# Altium PCB YYB-PCB1.PcbDoc
Units mil, origin at the board's own origin, x right, y up, seen from the top; angles counter-clockwise.
Board outline 510.03 x 10390.03 mil, 2 copper layers (Top Layer, Bottom Layer); 69 components, 56 nets, 369 pads, 0 vias.
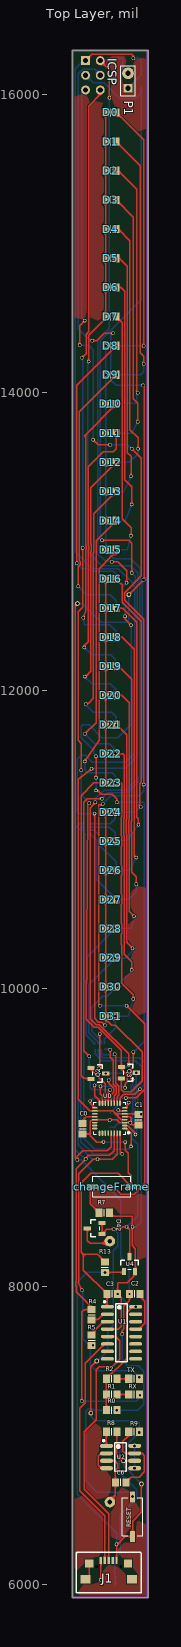
[diagram p0: Top Layer view]
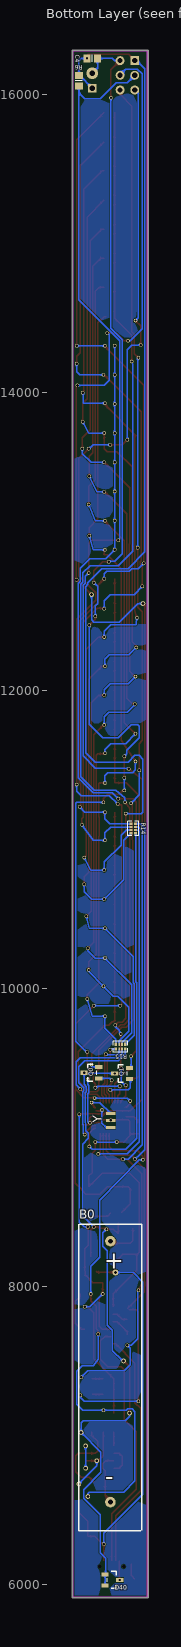
[diagram p1: Bottom Layer view, seen from below]
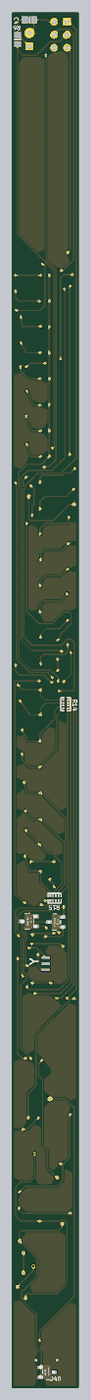
[diagram p2: 3D render of the assembled board from below, using the file's embedded part models]

## Layer stack, top to bottom
Top Solder: solder mask 0.4, Solder Resist, Dk 3.5
Top Layer: signal copper 1.4
Dielectric 1: dielectric 12.6, FR-4, Dk 4.8
Bottom Layer: signal copper 1.4
Bottom Solder: solder mask 0.4, Solder Resist, Dk 3.5

## Board outline
16889.99,5915 ccw(c16895,5915) 16895,5909.98 17395,5909.98 ccw(c17395,5915) 17400.01,5915 17400.01,16290 ccw(c17395,16290) 17399.35,16292.5 ccw(c17395,16295) 17400.01,16295 ccw(c17395,16295) 17395,16300.01 16895,16300.01 ccw(c16895,16295) 16889.99,16295

## Design rules (kind name [scope] priority, off if disabled: settings)
Clearance [All] p1: gap=7
PolygonConnect [All] p1: connectstyle=Relief reliefconductorwidth=10 reliefentries=4 polygonreliefangle="90 Angle" airgapwidth=10
RoutingVias [All] p1: holewidth=28 width=50 viastyle="Through Hole" minholewidth=28 minwidth=50 maxholewidth=28 maxwidth=50
SolderMaskExpansion [All] p1: expansion=4
Width [All] p1: maxlimit=10 minlimit=10 preferedwidth=10
30 further rules are at their usual default settings.

## Components (designator, comment, footprint, x,y, rotation, side; value= is the part's Value field where it differs from the comment)
B0 "Battery" LI 19525,3025 r180 bottom
C0 "" 6-0805_N 16960,9060 r90 top
C1 "Cap" 6-0805_N 17335,9120 r90 top
C2 "Cap" 6-0805_N 17310,7950 r180 top
C3 "Cap" 6-0805_N 17160,7950 r0 top
C4 "Cap" 6-0805_N 17265,16245 r0 bottom
C6 "Cap" 6-0805_N 17215,6685 r0 top
changeFrame "SW-PB" KEY_SODFL_2-LEADS 17155,8670 r180 top
D0 "LED" LED_0805 17150,15881.77 r0 top
D1 "LED" LED_0805 17150,15686.07 r0 top
D2 "LED" LED_0805 17150,15490.36 r0 top
D3 "LED" LED_0805 17150,15294.66 r0 top
D4 "LED" LED_0805 17150,15098.96 r0 top
D5 "LED" LED_0805 17150,14903.26 r0 top
D6 "LED" LED_0805 17150,14707.56 r0 top
D7 "LED" LED_0805 17150,14511.85 r0 top
D8 "LED" LED_0805 17150,14316.15 r0 top
D9 "LED" LED_0805 17150,14120.45 r0 top
D10 "LED" LED_0805 17150,13924.75 r0 top
D11 "LED" LED_0805 17150,13729.04 r0 top
D12 "LED" LED_0805 17150,13533.34 r0 top
D13 "LED" LED_0805 17150,13337.64 r0 top
D14 "LED" LED_0805 17150,13141.94 r0 top
D15 "LED" LED_0805 17150,12946.24 r0 top
D16 "LED" LED_0805 17150,12750.53 r0 top
D17 "LED" LED_0805 17150,12554.83 r0 top
D18 "LED" LED_0805 17150,12359.13 r0 top
D19 "LED" LED_0805 17150,12163.43 r0 top
D20 "LED" LED_0805 17150,11967.72 r0 top
D21 "LED" LED_0805 17150,11772.02 r0 top
D22 "LED" LED_0805 17150,11576.32 r0 top
D23 "LED" LED_0805 17150,11380.62 r0 top
D24 "LED" LED_0805 17150,11184.92 r0 top
D25 "LED" LED_0805 17150,10989.21 r0 top
D26 "LED" LED_0805 17150,10793.51 r0 top
D27 "LED" LED_0805 17150,10597.81 r0 top
D28 "LED" LED_0805 17150,10402.11 r0 top
D29 "LED" LED_0805 17150,10206.4 r0 top
D30 "LED" LED_0805 17150,10010.7 r0 top
D31 "LED" LED_0805 17150,9815 r0 top
D40 "二极管" SOT-23 17130,6030 r0 bottom
D42 "二极管" SOT-23 17041.1,8390 r0 top
ICSP "ICSP" DIP6 16980,16230 r0 top
J1 "USB_MINI" MICRO_USB 17135,6160 r0 top
P1 "Header 2" HDR1X2 17265,16045 r90 top
Q0 "transistor" SOT-23 17270,9435 r180 bottom
Q1 "transistor" SOT-23 17065,9430 r180 bottom
Q2 "transistor" SOT-23 17065,9430 r180 top
Q3 "transistor" SOT-23 17270,9435 r180 top
R0 "" 6-0805_N 17155,7170 r0 top
R1 "Res1" 6-0805_N 17155,7275 r0 top
R2 "Res1" 6-0805_N 17155,7380 r0 top
R4 "Res1" 6-0805_N 17020,7810 r270 top
R5 "Res1" 6-0805_N 17020,7640 r90 top
R6 "Res1" 6-0805_N 17355,16095 r270 bottom
R7 "Res1" 6-0805_N 17105,8495 r0 top
R8 "Res1" 6-0805_N 17155,7025 r180 top
R9 "Res1" 6-0805_N 17305,7025 r180 top
R13 "Res1" 6-0805_N 17110,8130 r270 top
R14 "300" 0402_RX4 16990,11075 r90 bottom
R15 "300" 0402_RX4 17075,9610 r0 bottom
RESET "SW-PB" KEY_SODFL_2-LEADS 17295,6455 r90 top
RX "LED" LED_0805 17305,7275 r0 top
TX "LED" LED_0805 17305,7380 r0 top
U0 "ATMEL328P" "ATMEL 328P 5*5" 17142.31,9130 r90 top
U1 "CH340B" SOP16 17245,7565 r0 top
U2 "DW03D" SOP-8 17215,6855 r270 top
U4 "SC662K" SOT-23 17275,8150 r270 top
Y "XTAL" XTAL 17165,9115 r0 bottom

## Footprints (in the part's own frame and the unit in brackets; to place one, negate y for a bottom-side part, rotate by r counter-clockwise, add the part's x,y. Pads: shape width x height; smd on the part's side, far side on the other; paste and mask are expansions set on the pad)
6-0805_N [mm] "Chip Resistor, Body 2.0x1.2mm, IPC Medium Density"
  rect 1.2x1.4 smd: 1(-0.9,0) 2(0.9,0)
  silkscreen extent 0,-0.6 0,0.6, body extent -1.07,-0.7 1.07,0.7, height 0.7
0402_RX4 [mm]
  rect 0.4x0.55 smd mask+0.051: 1(-0.8,-0.4) 4(0.8,-0.4) 5(0.8,0.4) 8(-0.8,0.4)
  rect 0.3x0.55 smd mask+0.051: 2(-0.25,-0.4) 3(0.25,-0.4) 6(0.25,0.4) 7(-0.25,0.4)
  silkscreen extent -1.25,-0.93 1.25,0.93, body extent -1,-0.5 1,0.5, height 0.45
"ATMEL 328P 5*5" [mm]
  oval 0.28x0.9 smd mask+0.051: 1(-1.75,-2.55) 2(-1.25,-2.55) 3(-0.75,-2.55) 4(-0.25,-2.55) 5(0.25,-2.55) 6(0.75,-2.55) 7(1.25,-2.55) 8(1.75,-2.55) 17(1.75,2.55) 18(1.25,2.55) 19(0.75,2.55) 20(0.25,2.55) 21(-0.25,2.55) 22(-0.75,2.55) 23(-1.25,2.55) 24(-1.75,2.55)
  oval 0.9x0.28 smd mask+0.051: 9(2.55,-1.75) 10(2.55,-1.25) 11(2.55,-0.75) 12(2.55,-0.25) 13(2.55,0.25) 14(2.55,0.75) 15(2.55,1.25) 16(2.55,1.75) 25(-2.55,1.75) 26(-2.55,1.25) 27(-2.55,0.75) 28(-2.55,0.25) 29(-2.55,-0.25) 30(-2.55,-0.75) 31(-2.55,-1.25) 32(-2.55,-1.75)
  silkscreen extent -2.7,-3.35 2.7,2.7
DIP6 [mil]
  rect 60x60 hole 35: 1(0,0)
  round 60 hole 35: 2(0,-98.43) 3(0,-196.85) 4(98.43,-196.85) 5(98.43,-98.43) 6(98.43,0)
HDR1X2 [mm] "Connector; Header; 2 Position"
  rect 1.5x1.5 hole 0.9: 1(0,0)
  round 2 hole 0.9: 2(2.54,0)
  silkscreen extent -1.27,-1.27 3.81,1.27
KEY_SODFL_2-LEADS [mm] "SODFL, 2-Leads, Body 3.25x8.00mm, IPC Medium Density"
  rect 1.85x0.85 smd: 1(-3.375,0) 2(3.375,0)
  silkscreen extent -3.25,-1.75 3.25,1.75, body extent -4,-1.8 4,1.91, height 2.5
LED_0805 [mm] "Chip LED  Body 2.0x1.2mm, IPC Medium Density"
  rect 1.2x1.4 smd: 1(-0.9,0) 2(0.9,0)
  silkscreen extent 0,-0.6 0,0.6, body extent -1.07,-0.7 1.07,0.7, height 0.7
LI [mm]
  round 1.8 hole 0.8: 1(60.5,134.1) 2(60.5,89.6)
  silkscreen extent 55.1,84.7 65.8,137
MICRO_USB [mm]
  round 0.5 hole 0.5: 0(-2.032,-1.016) 0(2.032,-1.016)
  rect 0.4x1.2 smd: 1(-1.333,0) 2(-0.667,0) 3(0,0) 4(0.667,0) 5(1.333,0)
  rect 1.4x1.4 smd: 6(-3.302,-0.508) 7(3.302,-0.508)
  rect 1.7x1.5 smd: 8(-3.937,-3.175) 9(3.937,-3.175)
  silkscreen extent -5.54,-5.46 5.59,1.4, body extent -4.4,-5.72 4.4,0.02, height 2.71
SOP16 [mm] "CH340G"
  oval 2.2x0.6 smd: 1(-3,7.595) 2(-3,6.325) 3(-3,5.055) 4(-3,3.785) 5(-3,2.515) 6(-3,1.245) 7(-3,-0.025) 8(-3,-1.295) 9(1.8,-1.295) 10(1.8,-0.025) 11(1.8,1.245) 12(1.8,2.515) 13(1.8,3.785) 14(1.8,5.055) 15(1.8,6.325) 16(1.8,7.595)
  silkscreen extent -3.65,-1.82 0.4,8.6, body extent -3.68,-1.78 2.51,8.13, height 1.7
SOP-8 [mm] "TC4056A 充电芯片"
  oval 0.7x2.2 smd: 1(-1.905,-2.4) 2(-0.635,-2.4) 3(0.635,-2.4) 4(1.905,-2.4) 5(1.905,2.4) 6(0.635,2.4) 7(-0.635,2.4) 8(-1.905,2.4)
  silkscreen extent -2.95,-3.05 2.4,1, body extent -2.5,-3.1 2.5,3.1, height 1.75
SOT-23 [mm]
  rect 1.25x0.7 smd: 1(1.25,-0.95) 2(1.25,0.95) 3(-1.25,0)
  silkscreen extent -0.65,-1.46 0.9,1.46, body extent -1.5,-1.5 1.5,1.5, height 1.3
XTAL [mm] "Chip Array, ConvexE, 6-Leads, Pitch 1.20mm,  Body 3.20x1.50mm,  IPC Medium Density"
  rect 1.6x0.5 smd: 1(-0.6,1.2) 2(-0.6,0) 3(-0.6,-1.2)

## Part data
C0: library part Cap, "Capacitor"
C1 C2 C3 C4 C6: "Capacitor"
changeFrame RESET: "Switch"
P1: "Header, 2-Pin"
R0: library part Res1, "Resistor"
R1 R2 R4 R5 R6 R7 R8 R9 R13: "Resistor"
R14 R15: library part ResistorPacks
U0: library part ATMEL-328P
U1: "usb to uart"
U4: library part SC662k-3.3V, "3.3V 稳压芯片"

## Free pads (board coordinates)
  round 23.62 hole 15.75: 9(17190,14120) 10(17180,13930) 11(17185,13730) 12(17185.43,13533.34) 13(17185,13335) 14(17180,13140) 15(17180,12945) 17(17185,12550) 18(17185,12360) 19(17180,12165) 20(17185,11970) 21(17185,11770) 22(17180,11580) 23(17180,11380) 24(17180,11185) 25(17180,10995) 26(17185,10795) 27(17185,10600) 28(17180,10405) 29(17180,10205) 30(17190,10015) 31(17180,9815) 32(17180,14315) 33(17370,14315) 34(17370,14195) 35(17330,14000) 36(17330,13805) 37(17332.24,13625) 38(17285,13440) 39(17290,13250) 40(17285,13040) 48(17185.43,12750.53) 49(16920,12855) 50(16930,12700) 51(16965,12490) 54(16970,12290) 55(16975,12095) 56(16980,11910) 57(16975,11710) 58(16975,11525) 60(17350,11220) 61(17335,11100) 62(17320,10880) 63(17320,10700) 64(17305,10485) 65(17295,10270) 66(17290,10125) 67(17300,9930) 68(17114.57,14316.15) 69(17114.57,14120.45) 70(17114.57,13924.75) 71(17114.57,13729.04) 72(17114.57,13533.34) 73(17114.57,13337.64) 74(17114.57,13141.94) 75(17114.57,12946.24) 82(17060,8855) 84(17225,8890) 85(17285,8940) 87(17315,9020) 88(17345,9325) 89(17175,9560) 90(17145,9590) 93(16980,8855) 94(17000,14210) 95(17045,11250) 97(17090,11275) 98(17005,9545) 99(17114.21,9430) 100(17319.21,9435) 101(17270,9490) 103(17080,9345) 105(17145,9320) 107(17135,9385) 108(16955,7975) 109(17030,7605) 110(17274.57,7950) 111(16925,8850) 113(17090,13010) 114(17290,12790) 115(17020,11475) 116(17255,8400) 119(17340,7390) 120(16955,7230) 121(17345,7270) 122(17225,7680) 124(17190,7170) 125(17100,8970) 126(17245,8970) 146(17165,14400) 147(17025,14350) 148(16975,14485) 149(16940,14320) 150(17030,13685) 151(17145,13650) 152(17290,13625) 154(17095,11240) 155(17077.5,9885) 156(17255,9885) 157(17250,9265) 158(17010,9245) 159(17005,11245) 160(16950,11465) 161(16955,14235) 162(16960,12960) 163(17352.57,9155.43) 164(17295,8400) 165(17300.43,16245) 166(17040,11175) 167(17110,9755) 168(17075,9695) 169(17070,9465) 170(17040,9350) 171(17140,15980) 174(17155,12865) 175(17255,12725) 176(17245,12500) 177(17285,12440) 178(17050,11560) 179(17050,11415) 180(17050,11330) 181(17190,11250) 182(17370,11370) 184(17300,9575) 185(17295,9390) 186(17245,9335) 187(17280,9100) 188(17195.43,7950) 189(17315.87,7864.02) 190(17141.38,9115) 191(17270,9235) 192(17200,9185) 193(17170,8385) 194(17080.79,6030) 196(17187.5,6270)
  round 39.37 hole 19.68: 127(17110,8094.57)
  round 31.5 hole 19.68: 128(17055,7500) 129(17015,7150) 130(17340,7020) 131(17309.49,6780) 132(17309.49,6930) 133(17295,6590) 134(17355,6675) 135(17235,6830) 142(16925,12585) 143(17270,12645)
  round 23.62 hole 19.68: 144(17370,12745) 145(17365,14050)

## Nets (pads, with @x,y where several pads share a name; then routed paths per layer and width w, separated by ;. In a path a pad name is that pad's centre, name@x,y a point inside that pad or via, vN(x,y) a via of type N, cw(c..) or ccw(c..) an arc to the next point about the centre after c; other vN are vias at no path point)
3.3V: C1.2 C3.2 ICSP.2 pad.113 pad.114 pad.115 pad.163 pad.164 pad.188 pad.189 R0.1 R1.1 R2.1 R6.2 R7.2 U0.4 U0.6 U0.18 U1.4 U1.16 U4.2 | length 11282.1
  Top Layer w10: pad.115 16930,11404.57 16930,9258.59 17009.37,9179.21 U0.18 17160.79,9179.21 17180.47,9159.53 ; pad.113 17270,13010 17290,12990 pad.114 ; R0.1@17119.57,7149.57 R0.1 R1.1 R2.1 17255,7515.43 17255,7825 17294.02,7864.02 U1.16 ; U1.4@17136.89,7714.02 17199.02,7714.02 17218,7733 17218,7860.04 17220,7862.04 17220,7925.43 C3.2 17195.43,8025.43 17260.43,8025.43 17312.4,8077.4 U4.2 17315,8103.39 17315,8255 17292.4,8277.6 pad.164@17292.4,8397.4 ; R7.2 17162.84,8472.6 17292.4,8472.6 pad.164@17292.4,8397.4 ; U0.4 17219.84,9120.16 17180.47,9159.53 ; pad.164@17297.4,8400.79 pad.164@17292.4,8397.4 ; pad.163 17335.61,9158.64 17330.91,9159.53 U0.6 17180.47,9159.53
  Bottom Layer w10: ICSP.2 17031.57,16080 17105,16080 17210,15975 17315,15975 17355,16015 ; pad.115 17045,11480 17245,11480 17326.76,11561.76 17326.76,12706.48 17312.19,12721.05 17312.19,12767.81 pad.114 ; pad.113 17080,13020 17080,14350 17355,14625 17355,16015 ; pad.188 17281.42,7864.02 pad.189 ; pad.164 17320,8400 17352.57,8432.57 pad.163 ; R6.2 17355,16015
4.2V: D40.1 D40.2 D42.1 D42.2 pad.99 pad.100 pad.116 pad.128 pad.129 pad.130 pad.193 Q0.3 Q1.3 Q2.3 Q3.3 R9.1 U4.3 | length 4691.9
  Top Layer w10: pad.129 17015,7460 pad.128 ; D42.2 D42.1 17122.72,8385 pad.193 ; pad.193@17178.9,8390 17218.58,8390 17228.58,8400 pad.116 17275,8380 U4.3
  Bottom Layer w10: pad.129 17015,7130 17045,7100 17325,7100 17340,7085 pad.130 17207.25,6887.25 17207.25,6752.5 17322.75,6637 17322.75,6578.51 17211.31,6467.07 17211.31,6211.31 17175,6175 17175,6063.9 17179.21,6059.69 D40.2 ; pad.128@17065,7505 17130,7570 17130,7705 17165,7740 17165,8240 17195,8270 17195,8360 pad.193 ; pad.99 17314.21,9430 pad.100 17319.21,9356.93 17304.19,9341.9 17304.19,9308.1 17312,9300.28 17312,9172.58 17311.76,9172.34 17311.76,9138.53 17312,9138.28 17312,9097.96 17308,9093.96 17308,9043.81 17305.14,9043.81 17291.19,9029.86 17291.19,8993.81 17330,8955 17330,8475 pad.116@17260,8405
A0: U0.23
A1: U0.24
A2: U0.25
A3: U0.26
A4: U0.27
A5: U0.28
A6: U0.19
A7: U0.22
AGND: J1.5 pad.127 pad.134 pad.135 pad.196 R8.1 R13.2 RESET.1 U2.6 U4.1 | length 3322
  Top Layer w10: R13.2 17231.38,8094.57 U4.1 ; J1.5 pad.196 ; R8.1 17190.43,6864.57 17225,6830 pad.135 U2.6 ; pad.196@17192.5,6267.5 17247.13,6322.13 RESET.1 17295,6425 17355,6485 pad.134
  Bottom Layer w10: pad.127 16989.57,8094.57 16925,8030 16925,6605 17187.5,6342.5 pad.196 ; pad.135 17235,6795 pad.134
D0/RXD: pad.93 pad.120 pad.121 R4.1 R14.4 RX.2 U0.30 | length 4828.2
  Top Layer w10: pad.120 16955,7830 16970.43,7845.43 R4.1 ; R4.1@17030,7850.43 16916,7964.43 16916,8002.59 16914.34,8004.25 16914.34,8028.79 16916,8030.45 16916,8791 pad.93 16998.06,8880 17140,8880 17171.84,8911.84 U0.30
  Bottom Layer w10: pad.120 17320,7230 17345,7255 pad.121 ; R14.4 16941.5,11106.5 16912,11077 16912,8918 16945,8885 pad.93
D1/TXD: pad.82 pad.108 pad.109 pad.119 R5.1 R14.3 TX.2 U0.31 | length 4495.5
  Top Layer w10: pad.108 16933,8021.44 16933,8758 17030,8855 pad.82 17160,8855 17191.53,8886.53 U0.31
  Bottom Layer w10: pad.108 16960,7960 16960,7650 17005,7605 pad.109 17010,7585 17010,7475 17050,7435 17295,7435 pad.119 ; R14.3 16954.84,11084.84 16929,11059 16929,8951 17025,8855 pad.82
D2: pad.84 R14.2 U0.32 | length 2568.7
  Top Layer w10: U0.32 17211.21,8903.79 pad.84
  Bottom Layer w10: R14.2 16974.25,11063.38 16958.45,11063.38 16951.43,11056.35 16951.43,10048.55 16949,10046.12 16949,8971 17030,8890 pad.84
D3: pad.85 R14.1 U0.1 | length 2556
  Top Layer w10: U0.1 17253.9,9061.1 17285,9030 pad.85
  Bottom Layer w10: R14.1 16973,11042.25 16973,10046.08 16966,10039.08 16966,8994 17040,8920 17265,8920 pad.85
D4: pad.87 R15.8 U0.2 | length 962.3
  Top Layer w10: U0.2 17264.21,9080.79 17315,9030 pad.87
  Bottom Layer w10: R15.8 17043.5,9561.5 17090,9515 17315,9515 17355.82,9474.18 17355.82,9369.49 17321.19,9334.86 17321.19,9315.14 17329,9307.33 17329,9165.54 17328.76,9165.3 17328.76,9145.57 17329,9145.33 17329,9090.92 17325,9086.92 17325,9030 pad.87
D5: pad.88 R15.7 U0.9 | length 748.6
  Top Layer w10: U0.9 17211.21,9266.21 17235,9290 17310,9290 pad.88
  Bottom Layer w10: R15.7 17065.16,9564.84 17095,9535 17345,9535 17372.82,9507.18 17372.82,9352.82 pad.88
D6: pad.89 R15.6 U0.10 | length 465.4
  Top Layer w10: pad.89 17180,9550 17182,9548 17182,9364.76 17202.81,9343.95 17202.81,9284.78 17191.53,9273.5 U0.10
  Bottom Layer w10: R15.6 17084.84,9570.16 17100,9555 pad.89@17175,9555
D7: pad.90 R15.5 U0.11 | length 422.6
  Top Layer w10: pad.90 17145,9540 17165,9520 17165,9357.72 17185.81,9336.9 17185.81,9293.24 17171.84,9279.27 U0.11
  Bottom Layer w10: R15.5 17140.75,9594.25 pad.90
D8: pad.107 Q0.1 U0.12 | length 269.4
  Top Layer w10: pad.107 17135,9363.67 17168.81,9329.86 17168.81,9303.81 17152.16,9287.16 U0.12
  Bottom Layer w10: pad.107@17140,9380 17140,9390 17147.6,9397.6 Q0.1
D9: pad.105 Q1.1 U0.13 | length 296
  Top Layer w10: U0.13 17132.47,9307.47 pad.105
  Bottom Layer w10: Q1.1 17010,9386.81 17010,9335 17025,9320 pad.105
D10: Q2.1 U0.14 | length 277.2
  Top Layer w10: Q2.1 17015.79,9459.21 17112.79,9362.21 U0.14
D11/MOSI: ICSP.4 pad.103 pad.159 pad.160 pad.161 pad.162 pad.186 Q3.1 U0.15 | length 7224.7
  Top Layer w10: pad.160 16950,11645 16929,11666 16929,12529 16960,12560 16960,12815 16960.81,12815.81 16960.81,12872.72 16960,12873.53 pad.162 ; pad.161 16983,14263 16983,14392.04 17000,14409.04 17000,15925 17078.43,16003.43 ICSP.4 ; pad.159 16995.21,11235.34 16985.49,9821.79 16985.49,9794.51 17038.56,9741.44 17065.84,9741.44 17220.79,9586.5 Q3.1 17220.79,9459.21 17260,9420 17260,9375 17245,9360 pad.186@17245,9325 ; pad.103 17080,9295 17093.1,9281.9 U0.15
  Bottom Layer w10: 16950,11450 16950,11300 pad.159 ; pad.161 16960,14230 pad.162 ; pad.103 17225,9345 pad.186@17245,9325
D12/MISO: C4.2 ICSP.1 P1.1 pad.165 pad.166 pad.167 pad.168 pad.169 pad.170 R6.1 U0.16 | length 8572.2
  Top Layer w10: ICSP.1 16980,16231 17021,16272 17291,16272 17300.43,16262.57 pad.165 ; pad.170 17040,9280 17073.42,9246.58 U0.16 ; pad.166 17040,9800 17064.56,9775.44 17089.56,9775.44 pad.167 ; pad.169@17075,9455 pad.168
  Bottom Layer w10: ICSP.1 16965,16230 16912,16177 16912,12933 17025,12820 17200,12820 17295.19,12724.81 17295.19,12714.01 17309.76,12699.44 17309.76,11584.76 17245,11520 17025,11520 16980,11565 16950,11565 16925,11540 16925,11185 16935,11175 pad.166 ; pad.170 17045,9350 17070,9375 pad.169 ; pad.168 17085,9718.67 17110,9743.67 pad.167 ; P1.1 17350.43,16130.43 R6.1 17355,16230 17340,16245 pad.165 C4.2@17300.43,16267.57
D13/SCK: changeFrame.2 ICSP.3 pad.148 pad.149 pad.150 pad.151 pad.152 pad.154 pad.155 pad.156 pad.157 pad.158 pad.182 R7.1 U0.17 | length 9347.9
  Top Layer w10: pad.149 16940,14450 pad.148 ; pad.158 17010,9230 17041.1,9198.9 U0.17 ; pad.150 17065,13650 pad.151 ; R7.1 17010,8554.57 17010,8657.87 changeFrame.2 17165,8670 17215,8620 17307.99,8620 17336.29,8648.3 17336.29,8651.29 17378,8693 17378,9322.33 ; pad.155@17080,9885 pad.155 17075,9885 17067.75,9892.25 17067.75,11232.75 17087.75,11232.75 pad.154 ; pad.157@17255,9265 17258,9268 17321.67,9268 17377,9323.33 17377,9763 pad.156 ; pad.152 17355,13560 17355,12770 17242.25,12657.25 17242.25,12605.76 17370,12478.01 pad.182
  Bottom Layer w10: pad.149 17000,14320 17030,14290 pad.150 ; pad.148 16955,14505 16955,16008.15 ICSP.3 ; pad.158 17030,9265 17240,9265 pad.157 ; pad.155 pad.156 ; pad.154 17150,11295 17340,11295 17370,11325 pad.182 ; pad.151 17260,13650 17285,13625 pad.152
GND: C0.1 C1.1 C3.1 C4.1 changeFrame.1 ICSP.6 P1.2 pad.125 pad.126 pad.171 pad.174 pad.175 pad.176 pad.177 pad.178 pad.179 pad.180 pad.181 pad.184 pad.185 pad.187 pad.190 R13.1 U0.3 U0.5 U0.21 U1.1 Y.2 | length 11037.7
  Top Layer w10: C0.1@16954.43,9024.57 C0.1 16959.57,9025 17012.2,9025 ; pad.180 17060,11330 17085,11305 17160,11305 17190,11275 pad.181 ; pad.179 pad.178 ; ICSP.6 17140,16168.43 pad.171 ; pad.125 17054.41,8970 17012.2,9012.2 17012.2,9025 ; R13.1 17060.43,8215 16965,8215 ; U1.1 17124.57,7866.34 C3.1 16965,8109.57 16965,8215 ; pad.174 17195,12865 17255,12805 pad.175 ; U0.5 17275.16,9139.84 17285.43,9129.57 17285.43,9084.57 ; pad.126 17245,8915 17265,8895 17265,8765 17287.87,8742.13 changeFrame.1 17197.87,8760 17015,8760 16950,8695 16950,8230 16965,8215 ; pad.176 17245,12480 pad.177 ; pad.185 17282.61,9402.39 17282.61,9457.61 17300,9475 pad.184 ; C1.1 17285.43,9084.57 ; 17012.2,9025 17012.2,9107.73 17024.64,9120.16 U0.21 17189.84,9120.16 17209.53,9100.47 U0.3 17269.53,9100.47 17285.43,9084.57
  Bottom Layer w10: pad.180 pad.179 ; pad.178 17035,11575 17035,11600 16950,11685 16950,11760 16960,11770 17005,11770 17090,11685 17195,11685 17285,11775 pad.177 ; ICSP.6 17115,16230 17130,16245 C4.1 17229.57,16180.43 P1.2 ; pad.125 pad.126 ; pad.171 17140,14434.04 17063,14357.04 17063,12920.88 17113.88,12870 17150,12870 pad.174 ; pad.181 17370,11250 17375,11245 17375,9645 pad.184@17300,9570 ; pad.176 17245,12570 17230,12585 17230,12700 pad.175 ; pad.187@17285,9095 17295,9105 17295,9131.24 17294.76,9131.49 17294.76,9179.38 17295,9179.62 17295,9293.24 17287.19,9301.05 17287.19,9348.95 17295,9356.76 pad.185
LED0: D0.2 D8.2 D16.2 D24.2 pad.24 pad.32 pad.33 pad.48 pad.49 pad.60 R14.5 | length 5781.2
  Top Layer w10: pad.49 16920,12942.28 16919.19,12943.1 16919.19,12976.9 16920,12977.72 16920,14050.72 D8.2 ; D24.2@17185.43,11160.43 D24.2 ; D16.2 17225.25,12710.72 17225.25,12594.75 17353,12467 17353,11386.67 17342,11375.67 17342,11228 pad.60 ; D0.2 17370,15697.2 17370,14323 pad.33@17374,14319
  Bottom Layer w10: pad.49 16955,12820 17000.96,12820 17017.96,12803 17167,12803 17185.43,12784.57 pad.48 ; R14.5 17146.5,11106.5 17180,11140 pad.24 17315,11185 pad.60 ; pad.32 pad.33
LED1: D1.2 D9.2 D17.2 D25.2 pad.9 pad.17 pad.25 pad.34 pad.50 pad.61 R14.6 | length 5680.5
  Top Layer w10: pad.50@16930,12705 16930,12831.33 16943.81,12845.14 16943.81,12864.86 16937,12871.67 16937,12949.33 16936.19,12950.14 16936.19,12969.86 16937,12970.67 16937,13872.01 D9.2 ; D17.2 17230.17,12554.83 17325,12460 17325,11150 17335,11140 pad.61 ; D1.2 17346.19,15525.31 17346.19,14268.81 17370,14245 pad.34
  Bottom Layer w10: pad.50 16985,12645 17145,12645 17185,12605 pad.17 ; R14.6 17140.16,11084.84 17180,11045 pad.25 17260,10995 pad.61 ; pad.9 17350,14120 17370,14140 pad.34
LED2: D2.2 D10.2 D18.2 D26.2 pad.10 pad.18 pad.26 pad.35 pad.51 pad.62 R14.7 | length 5742.8
  Top Layer w10: pad.51 16980,12535 16980,12946.33 16983.81,12950.14 16983.81,12969.86 16980,12973.67 16980,13720 ; 16970,13709.31 D10.2 ; pad.18 D18.2 17225.87,12359.13 17306.06,12278.94 17306.06,11117.18 17305,11116.12 17305,11058.01 17306.06,11056.95 17306.06,10893.94 pad.62 ; D2.2 17199.64,15490.36 17322.24,15367.76 17322.24,14007.76 pad.35
  Bottom Layer w10: pad.51 16970,12445 16972,12443 17142,12443 17185,12400 pad.18 ; R14.7 17034.84,11065.16 17072,11028 17072,10963 17185,10850 pad.26 17275,10795 pad.62 ; pad.10 17325,13930 17325,13995 pad.35
LED3: D3.2 D11.2 D19.2 D27.2 pad.11 pad.19 pad.27 pad.36 pad.54 pad.63 R14.8 | length 5850.7
  Top Layer w10: pad.54 16971.46,12303.17 16998.32,12330.03 16998.32,12543.13 16997,12544.46 16997,12939.28 17000.81,12943.1 17000.81,12976.9 16999,12978.72 16997,12980.72 16997,13502 17100,13605 17165,13605 17185.43,13625.43 D11.2 ; D19.2 17201.57,12163.43 17289.06,12075.94 17289.06,11124.22 17288,11123.16 17288,11050.97 17289.06,11049.91 17289.06,10780.94 17320,10750 pad.63 ; D3.2 17300,15180.1 17300,13960 17330,13930 pad.36
  Bottom Layer w10: pad.54 17020,12240 17150,12240 17180,12210 pad.19 ; R14.8 17055,10994.25 17055,10730 pad.27 17270,10600 17320,10650 pad.63 ; pad.11 17290,13730 pad.36
LED4: D4.2 D12.2 D20.2 D28.2 pad.12 pad.20 pad.28 pad.37 pad.55 pad.64 R15.1 | length 6189
  Top Layer w10: pad.55 16980,12095 17015,12130 17015,12322.67 17016,12323.67 17016,12934.24 17017.81,12936.05 17017.81,12983.95 17015,12986.76 17015,13362.91 D12.2 ; D20.2 17222.28,11967.72 17272.06,11917.94 17272.06,11131.26 17271,11130.21 17271,11043.92 17272.06,11042.87 17272.06,10517.94 pad.64 ; D4.2 17201.04,15098.96 17278,15022 17278,13752 17332.24,13697.76 pad.37
  Bottom Layer w10: pad.55 17025,12045 17145,12045 17185,12005 pad.20 ; R15.1 16983,9686.25 16983,10032.04 16990,10039.04 16990,10215 pad.28 17285,10405 pad.64 ; pad.12 17273.34,13533.34 17332.24,13592.24 pad.37
LED5: D5.2 D13.2 D21.2 D29.2 pad.13 pad.21 pad.29 pad.38 pad.56 pad.65 R15.2 | length 5882.1
  Top Layer w10: pad.56 17001,11917 17033,11949 17033,12927.2 17034.81,12929.01 17034.81,12990.99 17035,12991.18 17035,13187.21 D13.2 ; D21.2 17187.98,11772.02 17255.06,11704.94 17255.06,11138.3 17254,11137.25 17254,11036.88 17255.06,11035.83 17255.06,10942.6 17255,10942.55 17255,10840.18 17255.06,10840.12 17255.06,10746.9 17255,10746.84 17255,10644.48 17255.06,10644.42 17255.06,10551.2 17255,10551.14 17255,10448.77 17255.06,10448.72 17255.06,10355.49 17255,10355.44 17255,10310 pad.65 ; D5.2 17206.74,14903.26 17261,14849 17261,13599 17285,13575 pad.38
  Bottom Layer w10: pad.56 16980,11905 17030,11855 17155,11855 17185,11825 pad.21 ; R15.2 17065.16,9639.84 17000,9705 17000,10025 pad.29 17245,10205 17295,10255 pad.65 ; pad.13 17235,13335 pad.38
LED6: D6.2 D14.2 D22.2 D30.2 pad.14 pad.22 pad.30 pad.39 pad.57 pad.66 R15.3 | length 5683.2
  Top Layer w10: pad.57 17050,11785 17050,12920.16 17051.81,12921.97 17051.81,12983.95 17052,12984.14 17052,13007 17065,13020 ; 17060,13016.5 D14.2 ; D22.2 17228.68,11576.32 17238.06,11566.94 17238.06,11145.34 17237,11144.29 17237,11029.84 17238.06,11028.79 17238.06,10949.64 17238,10949.59 17238,10833.14 17238.06,10833.08 17238.06,10753.94 17238,10753.88 17238,10637.44 17238.06,10637.38 17238.06,10558.24 17238,10558.18 17238,10441.73 17238.06,10441.68 17238.06,10362.53 17238,10362.48 17238,10302.96 17240,10300.96 17240,10230 17290,10180 pad.66 ; D6.2 17217.44,14707.56 17244,14681 17244,13416 17287.5,13372.5 17290,13375 pad.39
  Bottom Layer w10: pad.57 17040,11645 17140,11645 17180,11605 pad.22 ; R15.3 17084.84,9650.16 17020,9715 17020,9875 17095,9950 17125,9950 pad.30 17290,10115 pad.66 ; pad.14 17245,13140 pad.39
LED7: D7.2 D15.2 D23.2 D31.2 pad.15 pad.23 pad.31 pad.40 pad.58 pad.67 R15.4 | length 5486.9
  Top Layer w10: pad.58 17070,11666.57 17070,12820 17163.71,12913.71 17185.43,12913.71 D15.2 ; D7.2@17170,14510 17170,14511.85 D7.2 17227,14470.29 17227,13153 17285,13095 pad.40 ; D23.2 17214.38,11380.62 17221.06,11373.94 17221.06,11152.39 17220,11151.33 17220,11022.8 17221.06,11021.74 17221.06,10956.68 17221,10956.63 17221,10826.1 17221.06,10826.04 17221.06,10760.98 17221,10760.93 17221,10630.39 17221.06,10630.34 17221.06,10565.28 17221,10565.22 17221,10434.69 17221.06,10434.64 17221.06,10369.58 17221,10369.52 17221,10295.92 17223,10293.92 17223,10037 17300,9960 pad.67
  Bottom Layer w10: pad.58 16975,11470 16995,11450 17160,11450 17180,11430 pad.23 ; R15.4 17106.5,9661.5 17180,9735 pad.31 17265,9815 pad.67 ; pad.15 17260,12945 pad.40
NetB0_1: B0.1 D42.3 | length 263.2
  Top Layer w10: D42.3 16991.89,8308.11 17010,8290 17128.58,8290 B0.1 B0.1@17126.57,8304.53
NetB0_2: B0.2 C6.1 U2.3 | length 351.7
  Top Layer w10: U2.3 17175,6830 17195,6810 17195,6780 17179.57,6764.57 C6.1 17179.57,6599.02 B0.2@17143.11,6562.56
NetC0_2: C0.2 U0.20 | length 111.3
  Top Layer w10: C0.2 16960,9114.25 16985.59,9139.84 U0.20
NetC2_1: C2.1 U1.13 | length 288.8
  Top Layer w10: U1.13 17339.02,7714.02 17378,7753 17378,7900 17345.43,7932.57 C2.1
NetC6_2: C6.2 R9.2 U2.7 | length 567.4
  Top Layer w10: C6.2 17285.43,6720 17340,6720 17375,6755 17375,6865 17360,6880 U2.7 17245,6880 17230,6895 17230,6960 17269.57,6999.57 R9.2
NetD0_1: D0.1 D1.1 D2.1 D3.1 D4.1 D5.1 D6.1 D7.1 pad.94 pad.95 pad.101 Q0.2 | length 7099.5
  Top Layer w10: pad.94 17000,14385 17114.57,14499.57 D7.1 D6.1 D5.1 D4.1 D3.1 D2.1 D1.1 D0.1 ; pad.95 17012.25,11209.06 17012.25,9797.75 17051.56,9758.44 17072.89,9758.44 17270,9561.33 pad.101
  Bottom Layer w10: pad.94 16995,14195 16995,12935 17090,12840 17280,12840 17329.19,12790.81 17329.19,12728.1 17343.76,12713.52 17343.76,11422.8 17252.96,11332 17108.43,11332 17106.43,11330 17048.09,11281.96 pad.95 ; Q0.2 17262.4,9472.4 17270,9480 pad.101
NetD8_1: D8.1 D9.1 D10.1 D11.1 D12.1 D13.1 D14.1 D15.1 pad.68 pad.69 pad.70 pad.71 pad.72 pad.73 pad.74 pad.75 pad.97 pad.98 Q1.2 | length 5330.3
  Top Layer w10: pad.98 16968.31,9581.69 16968.31,11251.98 16991.33,11275 pad.97
  Bottom Layer w10: pad.98 17005,9478.19 Q1.2 ; pad.97 17130,11315 17260,11315 17360.76,11415.76 17360.76,12720.57 17346.19,12735.14 17346.19,12822.85 17282.04,12887 17173.8,12887 pad.75 pad.74 pad.73 pad.72 pad.71 pad.70 pad.69 pad.68
NetD16_1: D16.1 D17.1 D18.1 D19.1 D20.1 D21.1 D22.1 D23.1 Q2.2 | length 3537.5
  Top Layer w10: Q2.2@17031.42,9397.6 16967.4,9397.6 16951.31,9413.69 16951.31,11296.31 17035.62,11380.62 D23.1 D22.1 D21.1 D20.1 D19.1 D18.1 D17.1 D16.1
NetD24_1: D24.1 D25.1 D26.1 D27.1 D28.1 D29.1 D30.1 D31.1 Q3.2 | length 2178.8
  Top Layer w10: 17114.57,9780.43 D31.1 D30.1 D29.1 D28.1 D27.1 D26.1 D25.1 D24.1 ; 17116.19,9778.81 17131.19,9778.81 17155,9755 17180,9755 17360,9575 17360,9380 17287,9307 17236.03,9307 17220.79,9322.24 Q3.2
NetR1_2: R1.2 RX.1 | length 74.1
  Top Layer w10: R1.2 RX.1@17264.57,7275
NetR2_2: R2.2 TX.1 | length 79.1
  Top Layer w10: R2.2 TX.1
NetR4_2: R4.2 U1.2 | length 111.2
  Top Layer w10: R4.2@17030,7779.57 17064.57,7779.57 17099.02,7814.02 U1.2
NetR5_2: R5.2 U1.3 | length 145
  Top Layer w10: R5.2@17030,7675.43 17030,7695 17099.02,7764.02 U1.3
NetR8_2: R8.2 U2.1 | length 95.4
  Top Layer w10: R8.2 17119.57,6930.95 U2.1
NetU0_7: pad.192 U0.7 Y.1 | length 205
  Top Layer w10: pad.192 17205.79,9179.21 U0.7
  Bottom Layer w10: Y.1 17172.76,9067.76 17200,9095 pad.192
NetU0_8: pad.191 U0.8 Y.3 | length 206.8
  Top Layer w10: U0.8 17248.9,9198.9 pad.191
  Bottom Layer w10: Y.3 17214.13,9235 pad.191
NetU2_2: U2.2 U2.4 | length 187.6
  Top Layer w10: U2.4 17085,6780 17065,6800 17065,6860 17085,6880 U2.2
NetU2_5: pad.131 pad.132 U2.5 U2.8 | length 150
  Bottom Layer w10: pad.131 pad.132
RESET: C2.2 ICSP.5 pad.110 pad.111 pad.122 pad.124 pad.133 pad.142 pad.143 pad.144 pad.145 pad.146 pad.147 R0.2 RESET.2 U0.29 | length 12041.2
  Top Layer w10: pad.142 16915,12585 16912,12582 16912,8863 pad.111 16925,8875 16960,8910 17125,8910 17152.16,8937.16 U0.29 ; pad.147 17055,14350 17105,14400 pad.146 ; pad.122 17225,7703.96 17237,7715.96 17237,7867 17274.57,7904.57 C2.2 ; pad.143 pad.144 17373.81,12748.81 17373.81,14041.19 pad.145
  Bottom Layer w10: pad.111 16950.26,8849.74 17215,8579.48 17215,8195 17274.57,8135.43 pad.110 ; pad.142 16960,12585 17085,12460 17255,12460 17270,12475 pad.143 ; pad.147 17010,14350 16930,14430 16930,16140.97 16962.6,16173.57 17041.43,16173.57 17078.43,16136.57 ICSP.5 ; pad.146@17155,14395 17150,14390 17150,14085 17185,14050 pad.145 ; pad.122 17225,7510 17258.12,7467.42 17332.58,7467.42 17368.81,7431.19 17368.81,7208.81 17330,7170 pad.124 17035.5,7170 17027.75,7177.75 16997.75,7177.75 16980,7160 16980,6695 17055,6620 17285,6620 17295,6610 pad.133
UD+: J1.3 U1.5 | length 1780.6
  Top Layer w10: J1.3 17135,6475 16970,6640 16970,7024.04 17050,7104.04 17050,7440 17070,7460 17160,7460 17210,7510 17210,7635 17180.98,7664.02 U1.5@17136.89,7664.02
UD-: J1.2 U1.6 | length 1611.8
  Top Layer w10: J1.2 17108.75,6461.25 16940,6630 16940,7181.33 16978.81,7220.14 16978.81,7483.81 17109.02,7614.02 U1.6
USB_5V: D40.3 J1.1 pad.194 | length 130.7
  Top Layer w10: pad.194 17082.5,6031.71 J1.1
pads on no net: J1.0 J1.4 J1.6 J1.7 J1.8 J1.9 U1.7 U1.8 U1.9 U1.10 U1.11 U1.12 U1.14 U1.15
copper on no net: | length 115.4
  Top Layer w10: 16980,6035 17005,6060 17005,6140

## Polygon pours and split planes (outlines as drawn)
no net on Top Layer "GND" (solid, pour order 0): 16895,16285 16905,16295 17395,16295 17395,5915 16895,5915 16895,16295
no net on Bottom Layer "GND" (solid, pour order 2): 16895,16295 17390,16295 17390,5930 17395,5925 17385,5915 16895,5915

## Keep-outs
Keep-Out Layer:
  lines w10: 16895,5915 17395,5915 17395,16295 16895,16295 16895,5915

## Text inside footprints (layer, text, board x,y; h text height)
B0: Bottom Overlay "-" at 17178.54,6627.36 h196.85; Bottom Overlay "+" at 17186.42,8080.12 h196.85